# Altium PCB NC1-1B-BASIS.PcbDoc (part 3 of 4)
Units mm, origin at the board's own origin, x right, y up, seen from the top; angles counter-clockwise.
Board outline 78 x 78 mm, 4 copper layers (Top Layer, Mid 1 (GND), Mid 2 (PWR), Bottom Layer), stack 1.586 mm thick; 290 components, 134 nets, 819 pads, 380 vias.
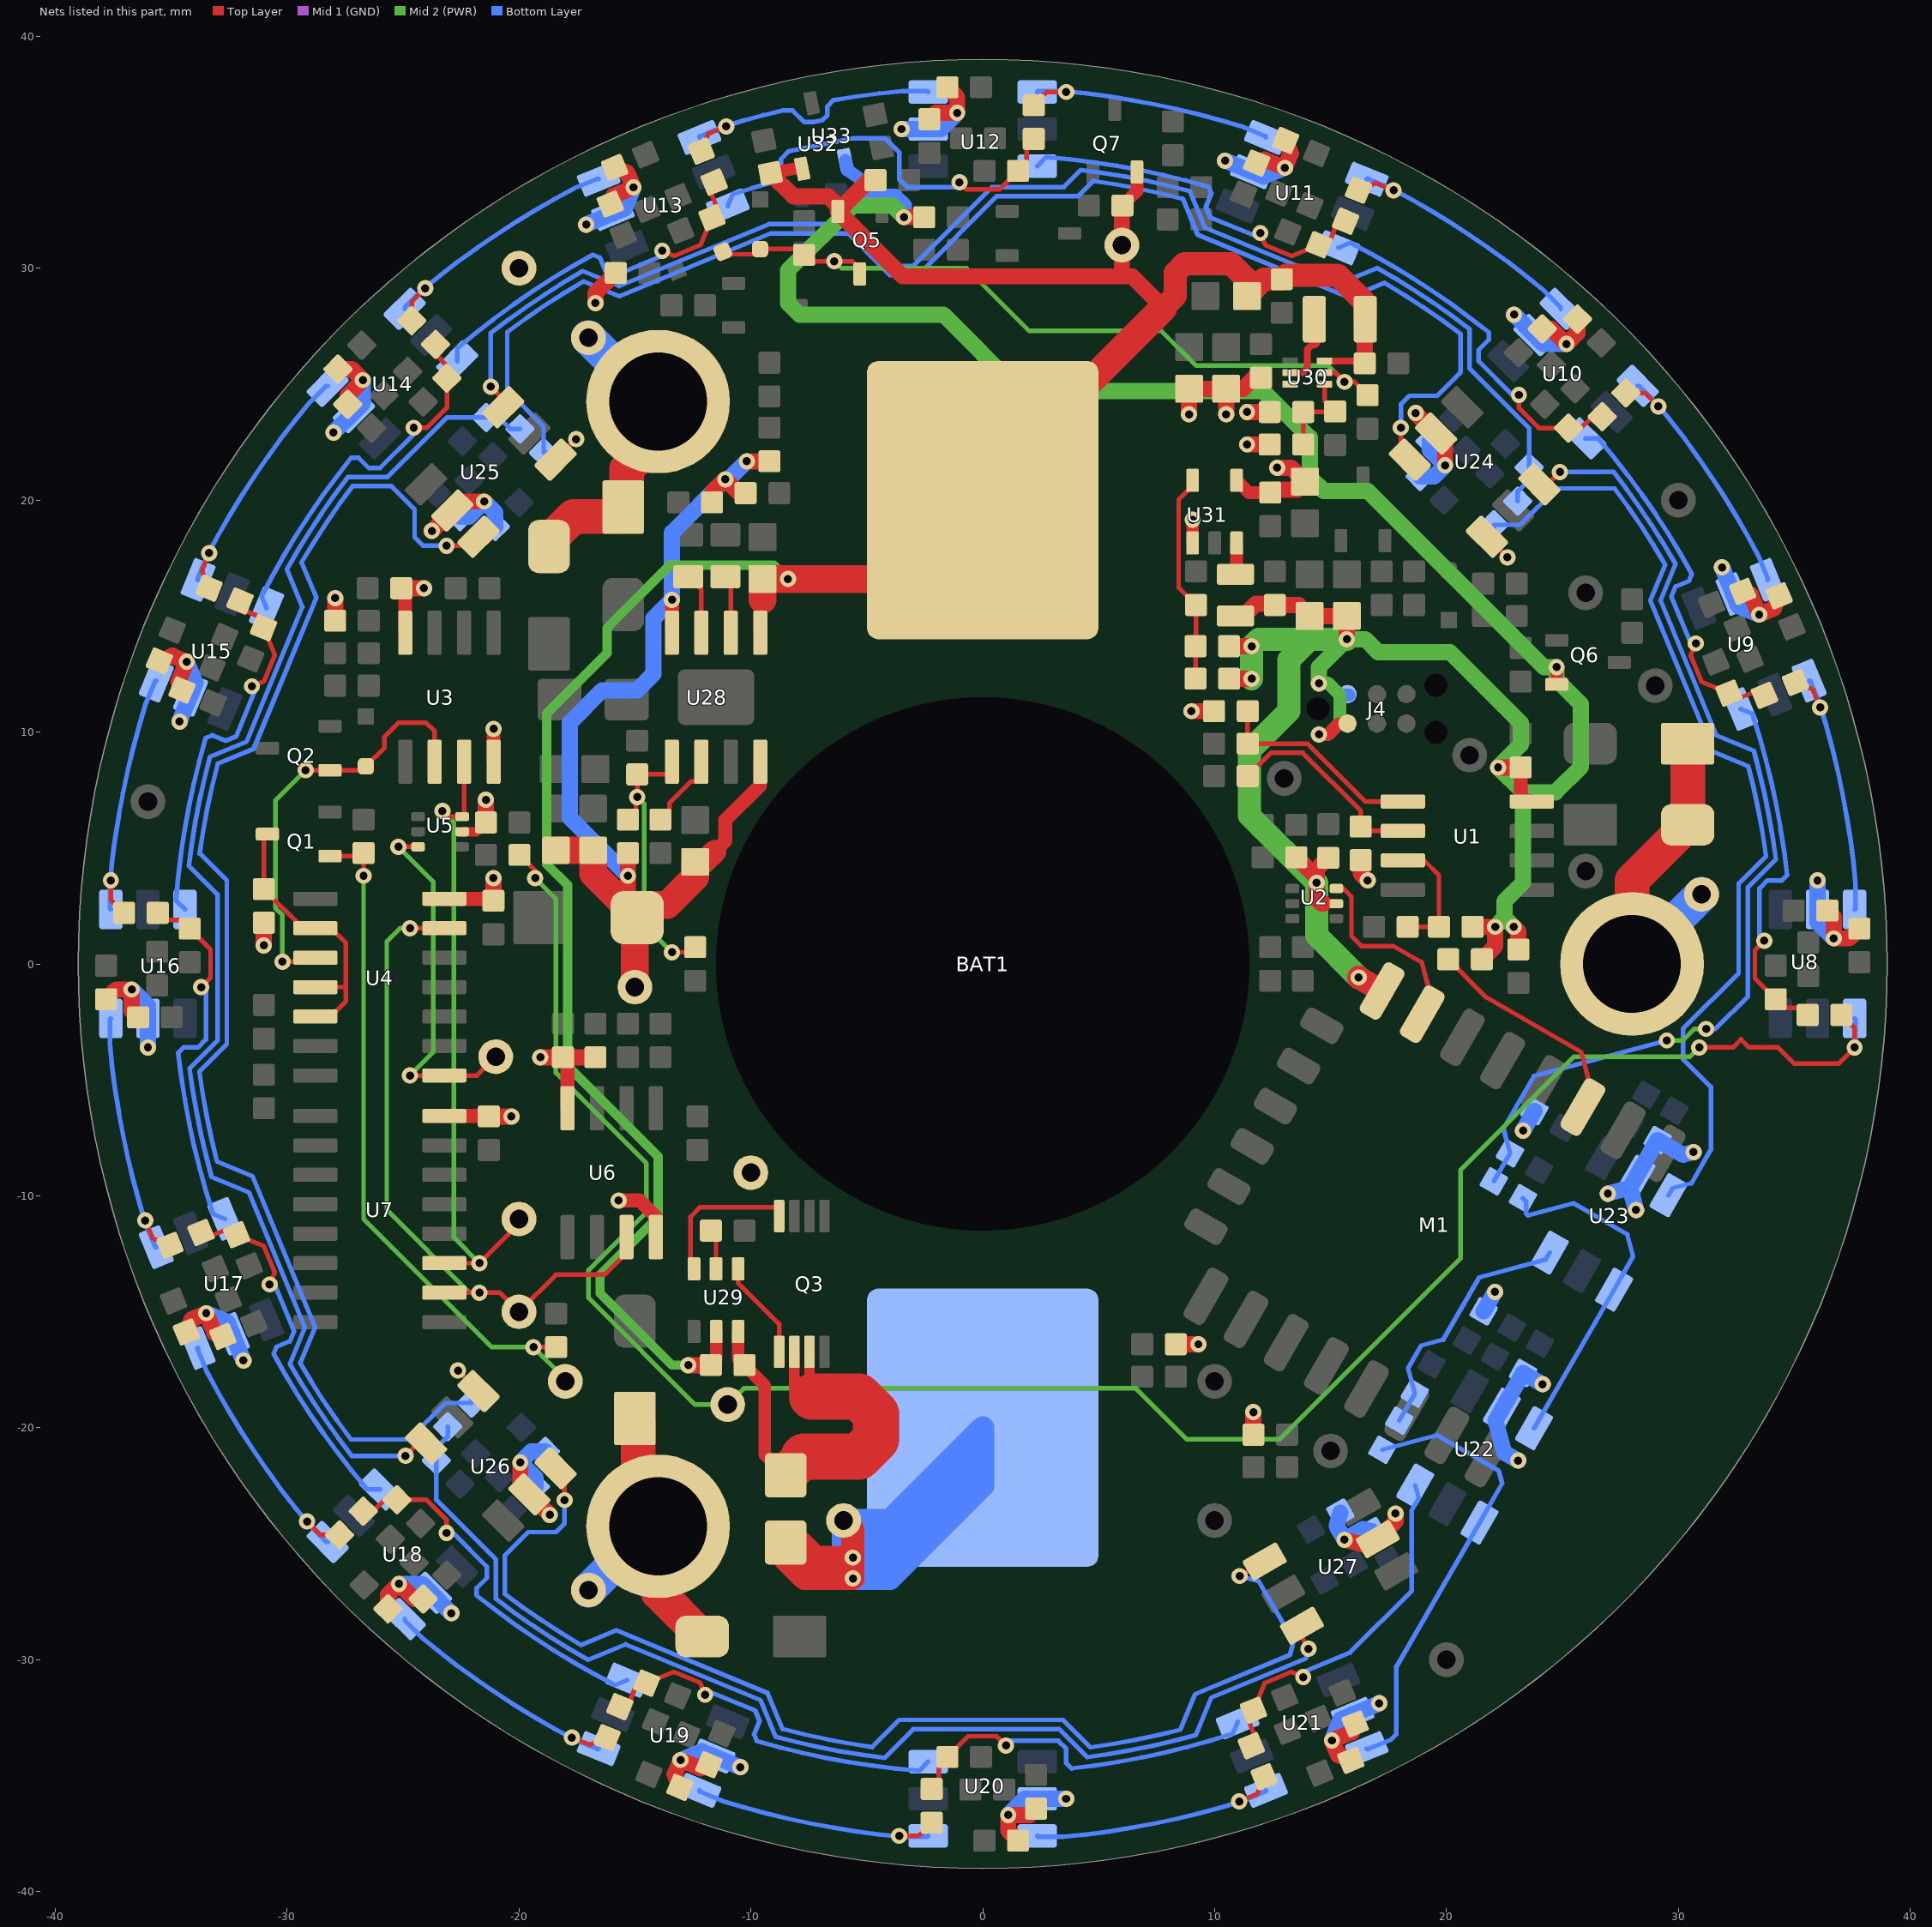
[diagram p4: the nets of this part, all layers, seen from the top]

## Via types
v1: diameter 0.7, hole 0.35, Top Layer to Bottom Layer, tented both sides, 372 vias
v2: diameter 0.7, hole 0.35, Top Layer to Bottom Layer, 8 vias

## Nets (pads, with @x,y where several pads share a name; then routed paths per layer and width w, separated by ;. In a path a pad name is that pad's centre, name@x,y a point inside that pad or via, vN(x,y) a via of type N, cw(c..) or ccw(c..) an arc to the next point about the centre after c; other vN are vias at no path point) (continued)
FS_DATA: (continued)
  Mid 2 (PWR) w0.2: v1(-25.2,5.05) -23.7,3.55 -23.7,-3.81 v1(-24.7,-4.81)
FS_EDGE/: D1.1 Q2.1@-28.15,8.35 U3.2 U4.3 | length 18.6
  Top Layer w0.2: v1(-30.2,0.1) -28.95,0.1 U4.3@-28.78,0.27 ; v1(-29.2,8.35) Q2.1@-28.15,8.35 -26.775,8.35 D1.1@-26.6,8.525 -25.8,9.325 -25.8,9.8 -25.2,10.4 -24,10.4 -23.635,10.035 U3.2@-23.635,8.72
  Mid 2 (PWR) w0.2: v1(-30.2,0.1) -30.2,2.1 -30.5,2.4 -30.5,7.05 v1(-29.2,8.35)
FS_PULSE: TP12.1 U4.13 U6.3 U7.10 | length 29.7
  Top Layer w0.2: v1(-24.7,1.54) U4.13@-23.22,1.54 ; U7.10@-23.22,-14.175 v1(-21.7,-14.175) -20.825,-14.175 TP12.1@-20,-15 -18.4,-13.4 -16.3,-13.4 -15.365,-12.465 U6.3@-15.365,-11.78
  Mid 2 (PWR) w0.2: v1(-24.7,1.54) -25.126,1.54 -25.7,0.966 -25.7,-10.6 -22.125,-14.175 v1(-21.7,-14.175)